# Altium PCB RPI-SENSOR.PcbDoc
Units mil, origin at the board's own origin, x right, y up, seen from the top; angles counter-clockwise.
Board outline 2205.71 x 2580.71 mil, 2 copper layers (Top Layer, Bottom Layer); 14 components, 19 nets, 86 pads, 0 vias.
Unrouted connection lines stored in the file: 32.
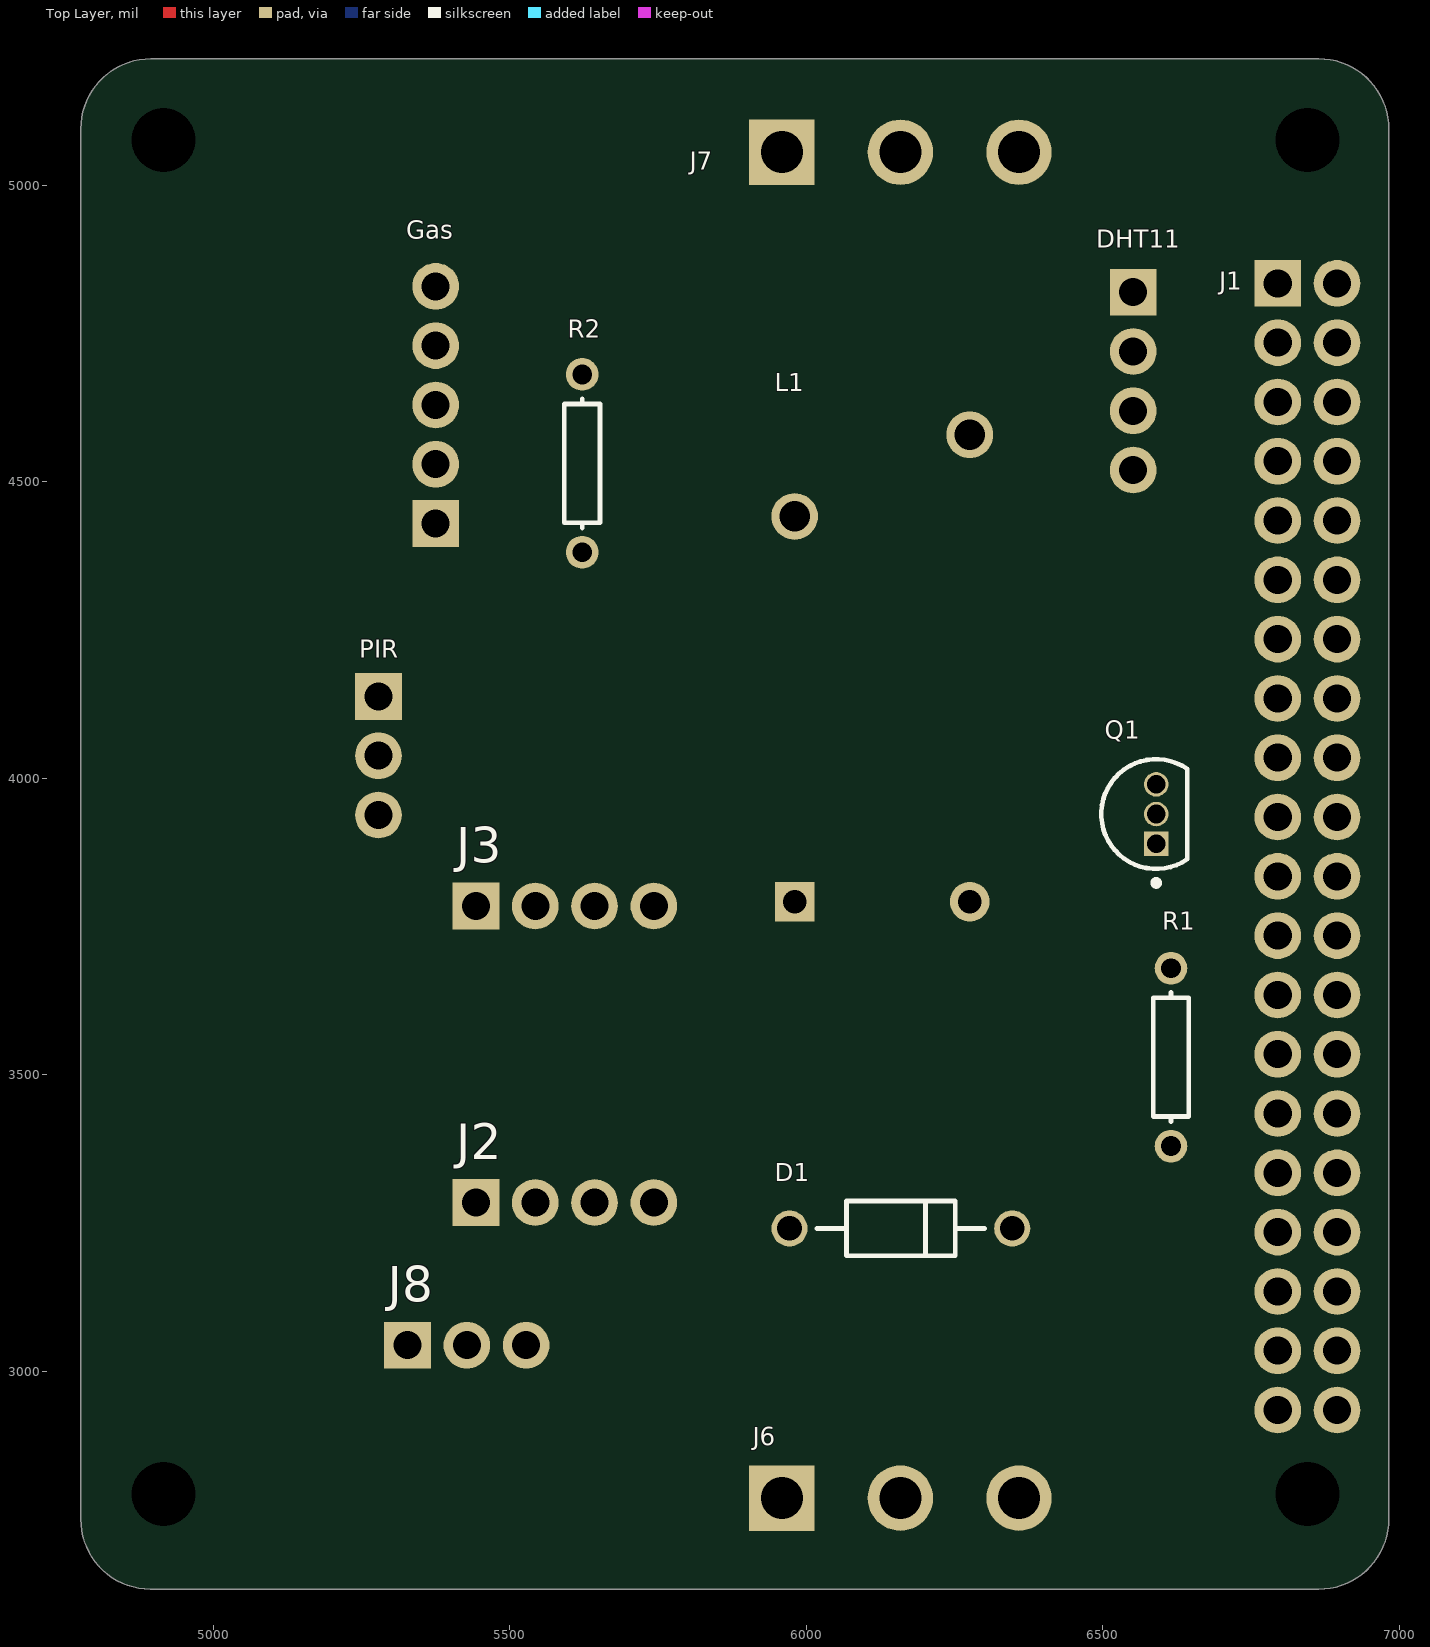
[diagram p0: Top Layer view]
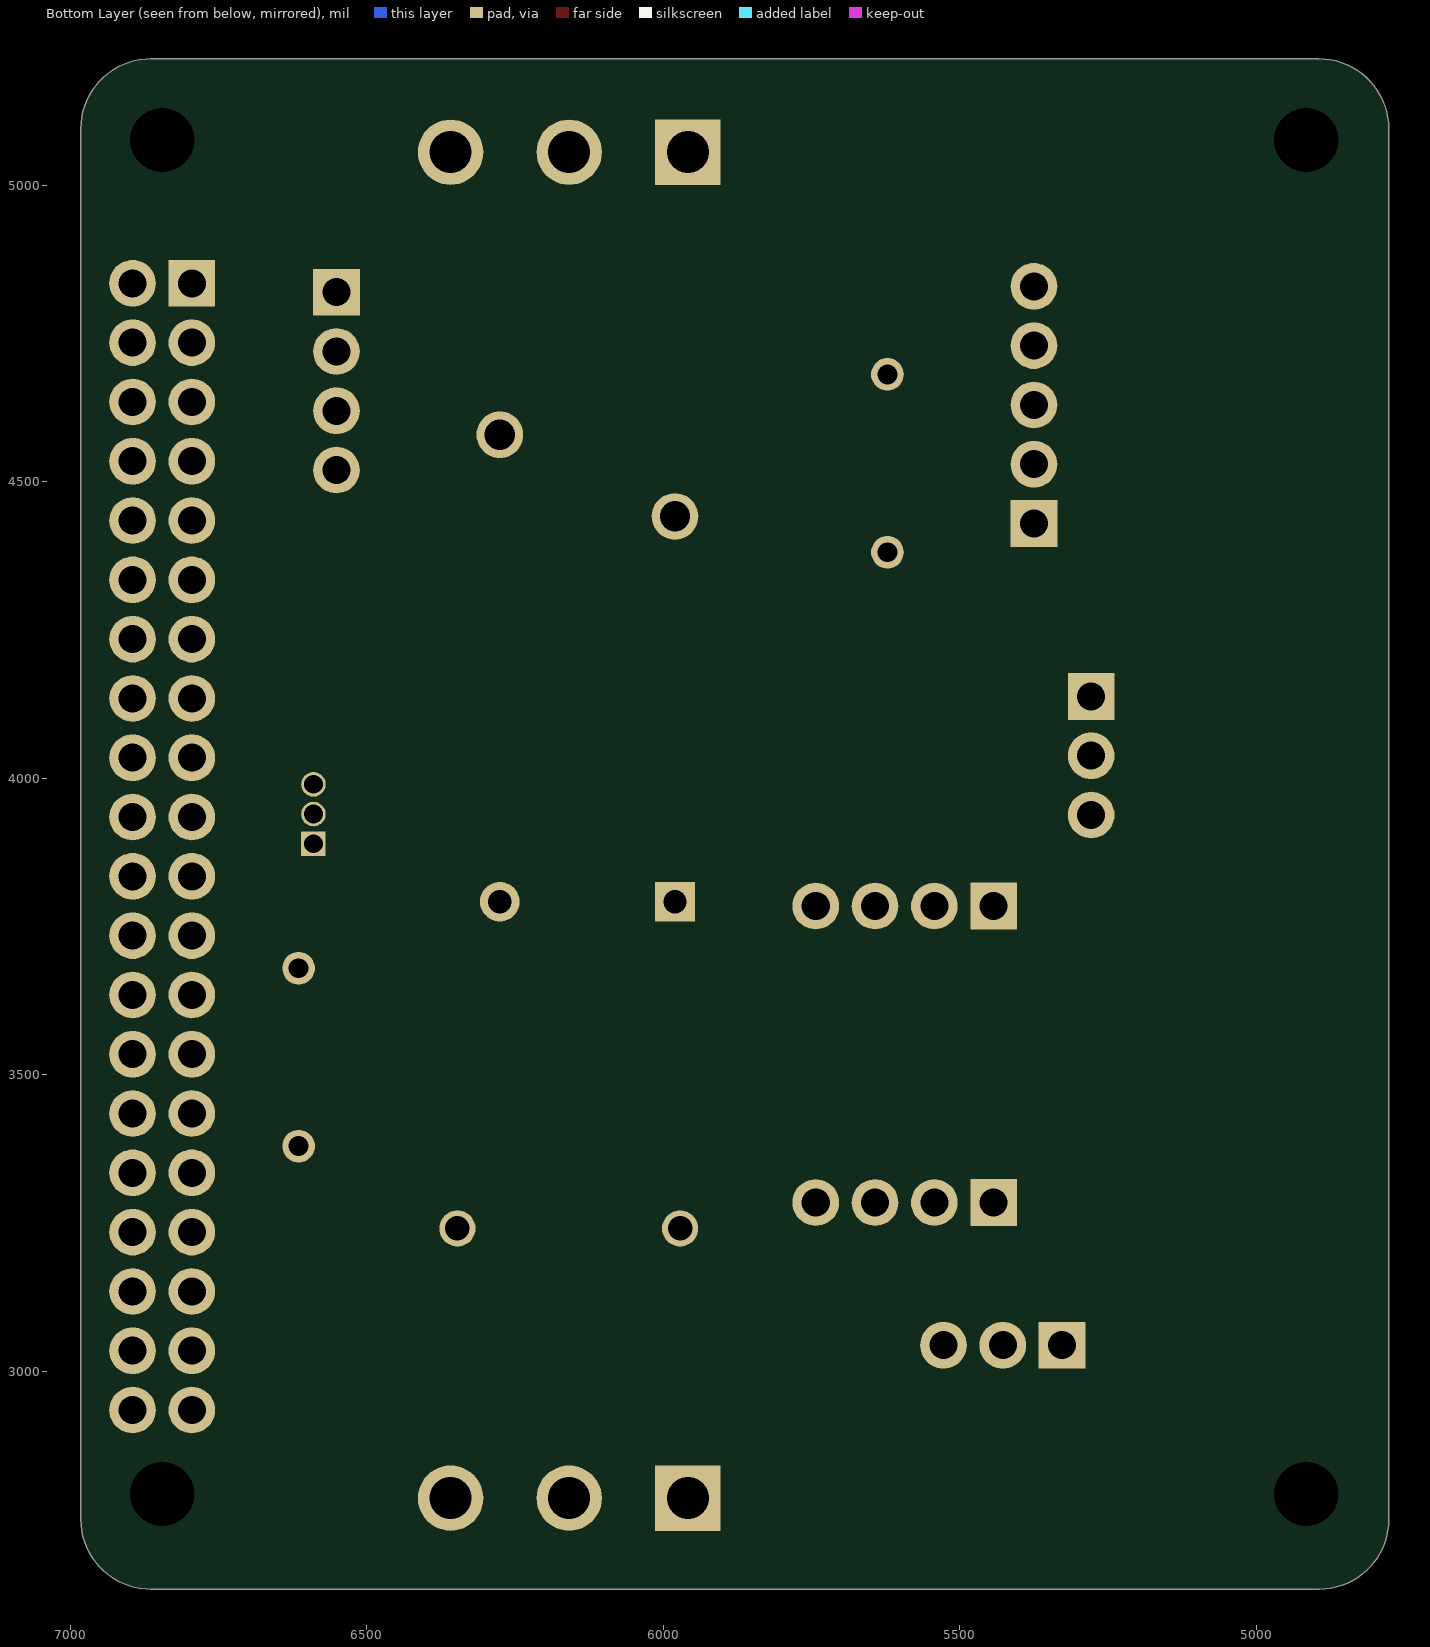
[diagram p1: Bottom Layer view, seen from below]

## Layer stack, top to bottom
Top Solder: solder mask 0.4, Solder Resist, Dk 3.5
Top Layer: signal copper 1.4
Dielectric 1: dielectric 12.6, FR-4, Dk 4.8
Bottom Layer: signal copper 1.4
Bottom Solder: solder mask 0.4, Solder Resist, Dk 3.5

## Board outline
4776.57,2750.98 ccw(c4894.19,2750.49) 4893.7,2632.87 4893.83,2633.01 6640.62,2633.01 6640.75,2632.87 6864.17,2632.87 ccw(c6864.17,2750.98) 6982.28,2750.98 6982.28,5095.47 ccw(c6864.17,5095.47) 6864.17,5213.58 4894.69,5213.58 ccw(c4894.69,5095.47) 4776.57,5095.47

## Design rules (kind name [scope] priority, off if disabled: settings)
Clearance [All] p1: gap=10 ignorepadtopadclearanceinfootprint=FALSE except(0: Arc-Hole Track-Hole SMDPad-Hole THPad-Hole Via-Hole Fill-Hole Poly-Hole Region-Hole Text-Hole)
PolygonConnect [All] p1: connectstyle=Relief reliefconductorwidth=10 reliefentries=4 polygonreliefangle="90 Angle" airgapwidth=10
RoutingVias [All] p1: holewidth=28 width=50 viastyle="Through Hole" minholewidth=28 minwidth=50 maxholewidth=28 maxwidth=50
SolderMaskExpansion [All] p1: expansion=4 istentingtop=FALSE
Width [All] p1: maxlimit=10 minlimit=10 preferedwidth=10
30 further rules are at their usual default settings.

## Components (designator, comment, footprint, x,y, rotation, side; value= is the part's Value field where it differs from the comment)
D1 "1N4007G" ONSC-AXIAL_LEAD-2-59-10_P 6159.45,3241.14 r180 top
DHT11 "DHT11" 4x1 6551.18,4820.08 r0 top (schematic designator J5)
Gas "Gas Sensor" 5x1 5375,4429.92 r180 top (schematic designator J4)
J1 "RPI-Header" RPI-Header 6795,4835 r0 top
J2 "ADC-SPI" 4x1 5442.95,3284.92 r90 top
J3 "ADC-SPI2" 4x1 5442.95,3784.92 r90 top
J6 "3x1-Terminal" 3x1-Terminal 5958.66,2786.42 r90 top
J7 "3x1-Terminal" 3x1-Terminal 5958.66,5056.1 r90 top
J8 "MIC" 3x1 5327.56,3044.29 r90 top
L1 "Relais" Relais 5980.31,3792.32 r90 top
PIR "PIR" 3x1 5278.54,4138.39 r0 top (schematic designator J9)
Q1 "P2N2222AG" ONSC-TO-92-3-29-11 6590,3940 r90 top
R1 "10k" AXIAL-0.3 6615,3530 r270 top value=1K
R2 "1.2k" AXIAL-0.3 5622.05,4531.5 r90 top value=1K

## Footprints (in the part's own frame and the unit in brackets; to place one, negate y for a bottom-side part, rotate by r counter-clockwise, add the part's x,y. Pads: shape width x height; smd on the part's side, far side on the other; paste and mask are expansions set on the pad)
3x1 [mm]
  rect 2x2 hole 1.2: 1(0,0)
  round 2 hole 1.2: 2(0,-2.54) 3(0,-5.08)
3x1-Terminal [mm]
  rect 2.8x2.8 hole 1.8: 1(0,0)
  round 2.8 hole 1.8: 2(0,-5.08) 3(0,-10.16)
4x1 [mm]
  rect 2x2 hole 1.2: 1(0,0)
  round 2 hole 1.2: 2(0,-2.54) 3(0,-5.08) 4(0,-7.62)
5x1 [mm]
  rect 2x2 hole 1.2: 1(0,0)
  round 2 hole 1.2: 2(0,-2.54) 3(0,-5.08) 4(0,-7.62) 5(0,-10.16)
AXIAL-0.3 [mm] "Axial Device, Thru-Hole; 2 Leads; 0.3 in Pin Spacing"
  round 1.4 hole 0.85: 1(-3.81,0) 2(3.81,0)
  silkscreen extent -2.77,-0.76 2.77,0.76
ONSC-AXIAL_LEAD-2-59-10_P [mm] "AXIAL, 2-Leads, Diameter 2.35mm"
  round 1.55 hole 1.05: 1(-4.77,0) 2(4.77,0)
  silkscreen extent -3.59,-1.17 3.59,1.17
ONSC-TO-92-3-29-11 [mm] "TO, 3-Leads, Body Dia 4.7mm, Pitch 1.27mm"
  rect 1.05x1.05 hole 0.8: 1(-1.27,0)
  round 1.05 hole 0.8: 2(0,0) 3(1.27,0)
  silkscreen extent -3.07,-1.34 2.35,2.35, body extent -2.35,-1.33 2.36,2.36, height 7.87
Relais [mm]
  rect 1.7x1.7 hole 1: 1(0,0)
  round 2 hole 1.3: 2(16.5,0) 3(20,-7.5)
  round 1.7 hole 1: 4(0,-7.5)
RPI-Header [mm]
  rect 2x2 hole 1.2: 1(0,0)
  round 2 hole 1.2: 2(2.54,0) 3(0,-2.54) 4(2.54,-2.54) 5(0,-5.08) 6(2.54,-5.08) 7(0,-7.62) 8(2.54,-7.62) 9(0,-10.16) 10(2.54,-10.16) 11(0,-12.7) 12(2.54,-12.7) 13(0,-15.24) 14(2.54,-15.24) 15(0,-17.78) 16(2.54,-17.78) 17(0,-20.32) 18(2.54,-20.32) 19(0,-22.86) 20(2.54,-22.86) 21(0,-25.4) 22(2.54,-25.4) 23(0,-27.94) 24(2.54,-27.94) 25(0,-30.48) 26(2.54,-30.48) 27(0,-33.02) 28(2.54,-33.02) 29(0,-35.56) 30(2.54,-35.56) 31(0,-38.1) 32(2.54,-38.1) 33(0,-40.64) 34(2.54,-40.64) 35(0,-43.18) 36(2.54,-43.18) 37(0,-45.72) 38(2.54,-45.72) 39(0,-48.26) 40(2.54,-48.26)

## Part data
D1: library part CMP-0902-00143-1, "Standard Recovery Rectifier, 2-Pin Axial_Lead, Pb-Free, Bulk Bag", Manufacturer="On Semiconductor", ComponentLink1Description="Manufacturer URL", ComponentLink1URL=http://www.onsemi.com/, ComponentLink2Description=Datasheet, ComponentLink2URL=http://www.onsemi.com/pub_link/Collateral/1N4001-D.PDF, ComponentLink3Description="Package Specification", ComponentLink3URL=http://www.onsemi.cn/pub_link/Collateral/59-10.PDF, DatasheetVersion="Rev. 13", IFSM Max (A)=30, IO(rec) Max (A)=1, Mounting Technology="Through Hole", PackageDescription="2-Pin, Axial Lead, Diameter 2.35 mm", PackageReference=AXIAL_LEAD-2-59-10, PackageVersion="Rev. U, 02/2005", Packing="Bulk Bag", PartNumber=1N4007G, RoHS=TRUE, Type="Standard Recovery", VRRM Max (V)=1000
DHT11 J2 J3: library part 4x1
Gas: library part 5x1
J8 PIR: library part 3x1
Q1: library part CMP-1048-01402-1, "Amplifier Transistor, NPN Silicon, 3-Pin TO-92, Pb-Free, Bulk Box", Manufacturer="On Semiconductor", ComponentLink1Description="Manufacturer URL", ComponentLink1URL=http://www.onsemi.com/, ComponentLink2Description=Datasheet, ComponentLink2URL=http://www.onsemi.com/pub_link/Collateral/P2N2222A-D.PDF, ComponentLink3Description="Package Specification", ComponentLink3URL=http://www.onsemi.cn/pub_link/Collateral/2N6426-D.PDF, DatasheetVersion="Rev. 7", fT Min (MHz)=300, IC Continuous (A)=0.6, Mounting Technology="Through Hole", PackageDescription="3-Pin Transistor Outline, Body 4.825 x 3.685 mm, Pitch 1.27 mm", PackageReference=TO-92-3-29-11_AM_SL, PackageVersion="Rev. AM", Packing="Bulk Box", PartNumber=P2N2222AG, Polarity=NPN, RoHS=TRUE
R1 R2: library part Res1, "Resistor", LatestRevisionDate=17-Jul-2002, LatestRevisionNote="Re-released for DXP Platform.", PackageDescription="Axial Device, Thru-Hole; 2 Leads; 0.3 in Pin Spacing", PackageReference=AXIAL-0.3, Published=8-Jun-2000, Publisher="Altium Limited"

## Free pads (board coordinates)
  round 60 hole 108.27: ""(4915.87,2793.27) ""(4915.87,5076.73) ""(6845,2793.27) ""(6845,5076.73)

## Nets (pads, with @x,y where several pads share a name; then routed paths per layer and width w, separated by ;. In a path a pad name is that pad's centre, name@x,y a point inside that pad or via, vN(x,y) a via of type N, cw(c..) or ccw(c..) an arc to the next point about the centre after c; other vN are vias at no path point)
NetD1_1: D1.1 DHT11.1 Gas.1 J1.2 J2.1 J3.4 J8.3 L1.4 PIR.1 R1.2 | length 11.9
  Top Layer w10: J1.2@6886.55,4843.45 J1.2
NetD1_2: D1.2 L1.1 Q1.1
NetJ1_3: Gas.5 J1.3
NetJ1_5: Gas.4 J1.5
NetJ1_7: J1.7 R2.2
NetJ1_9: J1.9 Q1.3
NetJ1_15: J1.15 PIR.2
NetJ1_21: J1.21 J3.2
NetJ1_23: J1.23 J3.3
NetJ1_31: DHT11.2 J1.31 R1.1
NetJ1_37: J1.37 J3.1
NetJ1_39: DHT11.4 Gas.3 J1.39 PIR.3
NetJ2_2: J2.2 J8.1
NetJ2_3: J2.3 J2.4 J8.2
NetJ6_1: J6.1 L1.2
NetJ6_2: J6.2 J7.2
NetJ6_3: J6.3 J7.3
NetJ7_1: J7.1 L1.3
NetQ1_2: Q1.2 R2.1
pads on no net: DHT11.3 Gas.2 J1.1 J1.4 J1.6 J1.8 J1.10 J1.11 J1.12 J1.13 J1.14 J1.16 J1.17 J1.18 J1.19 J1.20 J1.22 J1.24 J1.25 J1.26 J1.27 J1.28 J1.29 J1.30 J1.32 J1.33 J1.34 J1.35 J1.36 J1.38 J1.40